# Altium PCB Fatigue_V1.01.PcbDoc
Units mil, origin at the board's own origin, x right, y up, seen from the top; angles counter-clockwise.
Board outline 3525 x 2200 mil, 4 copper layers (Component Side, Ground Plane, Power Plane, Solder Side), stack 33.234 mil thick; 73 components, 45 nets, 270 pads, 274 vias.
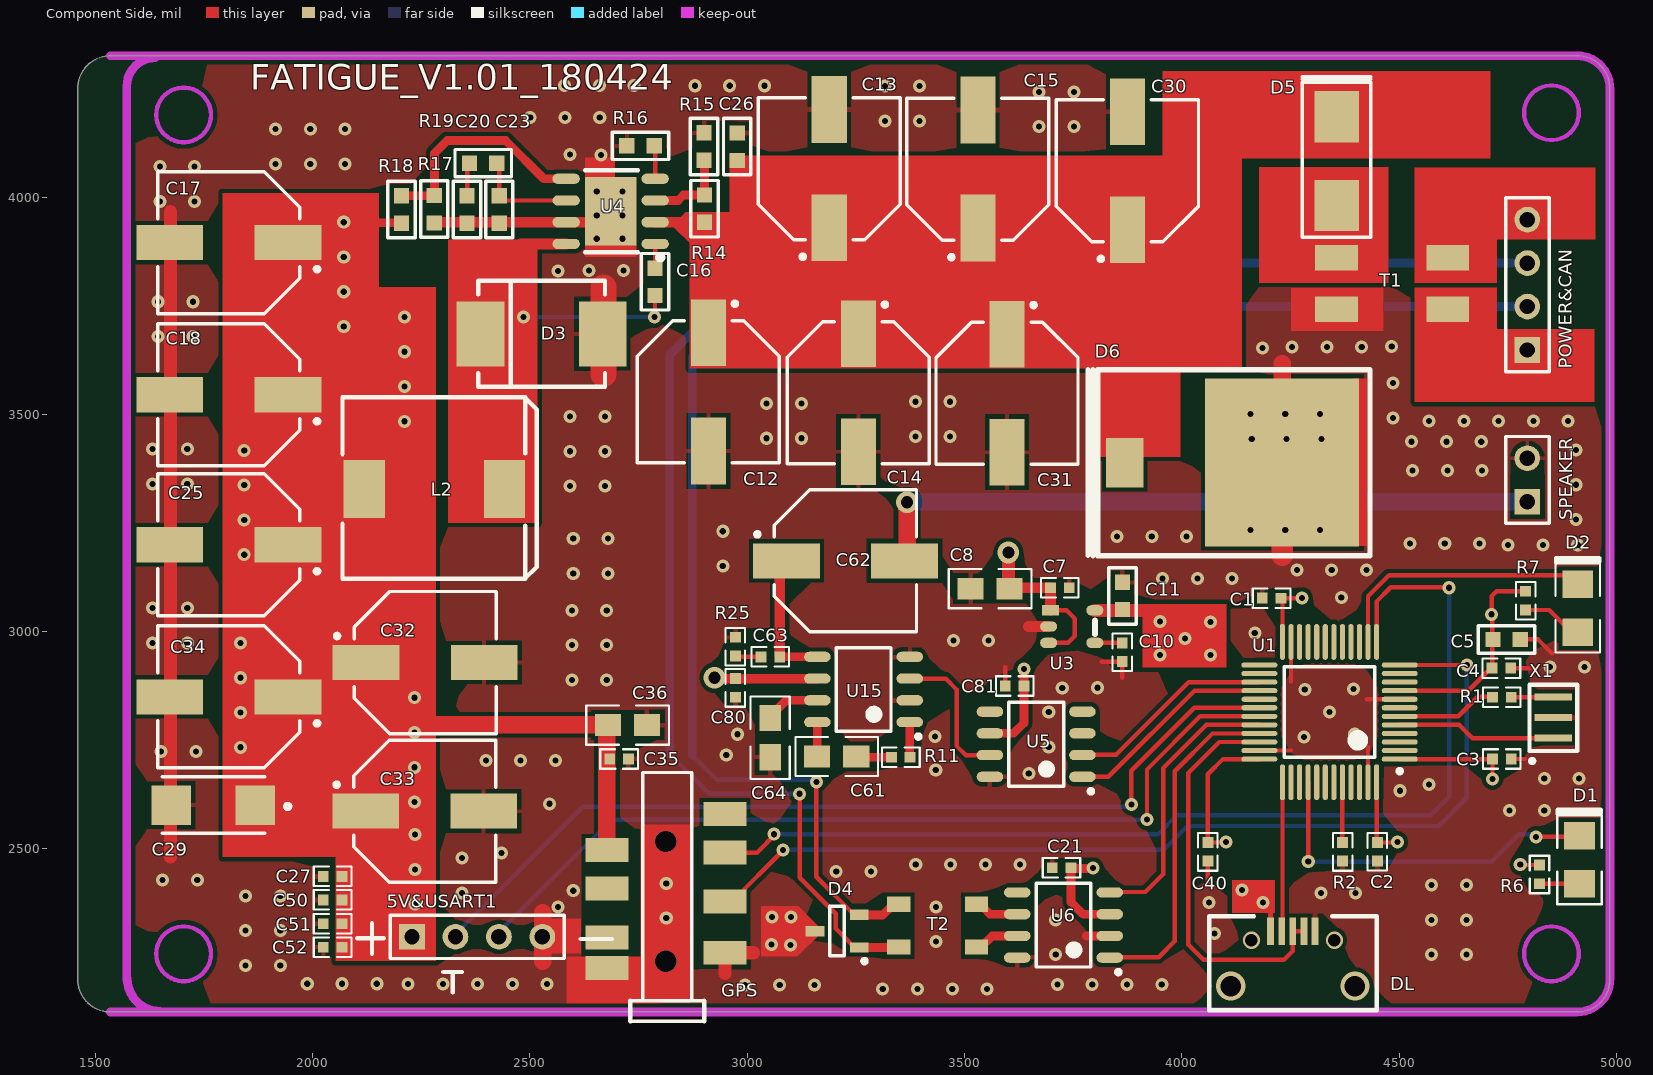
[diagram p0: Component Side view]
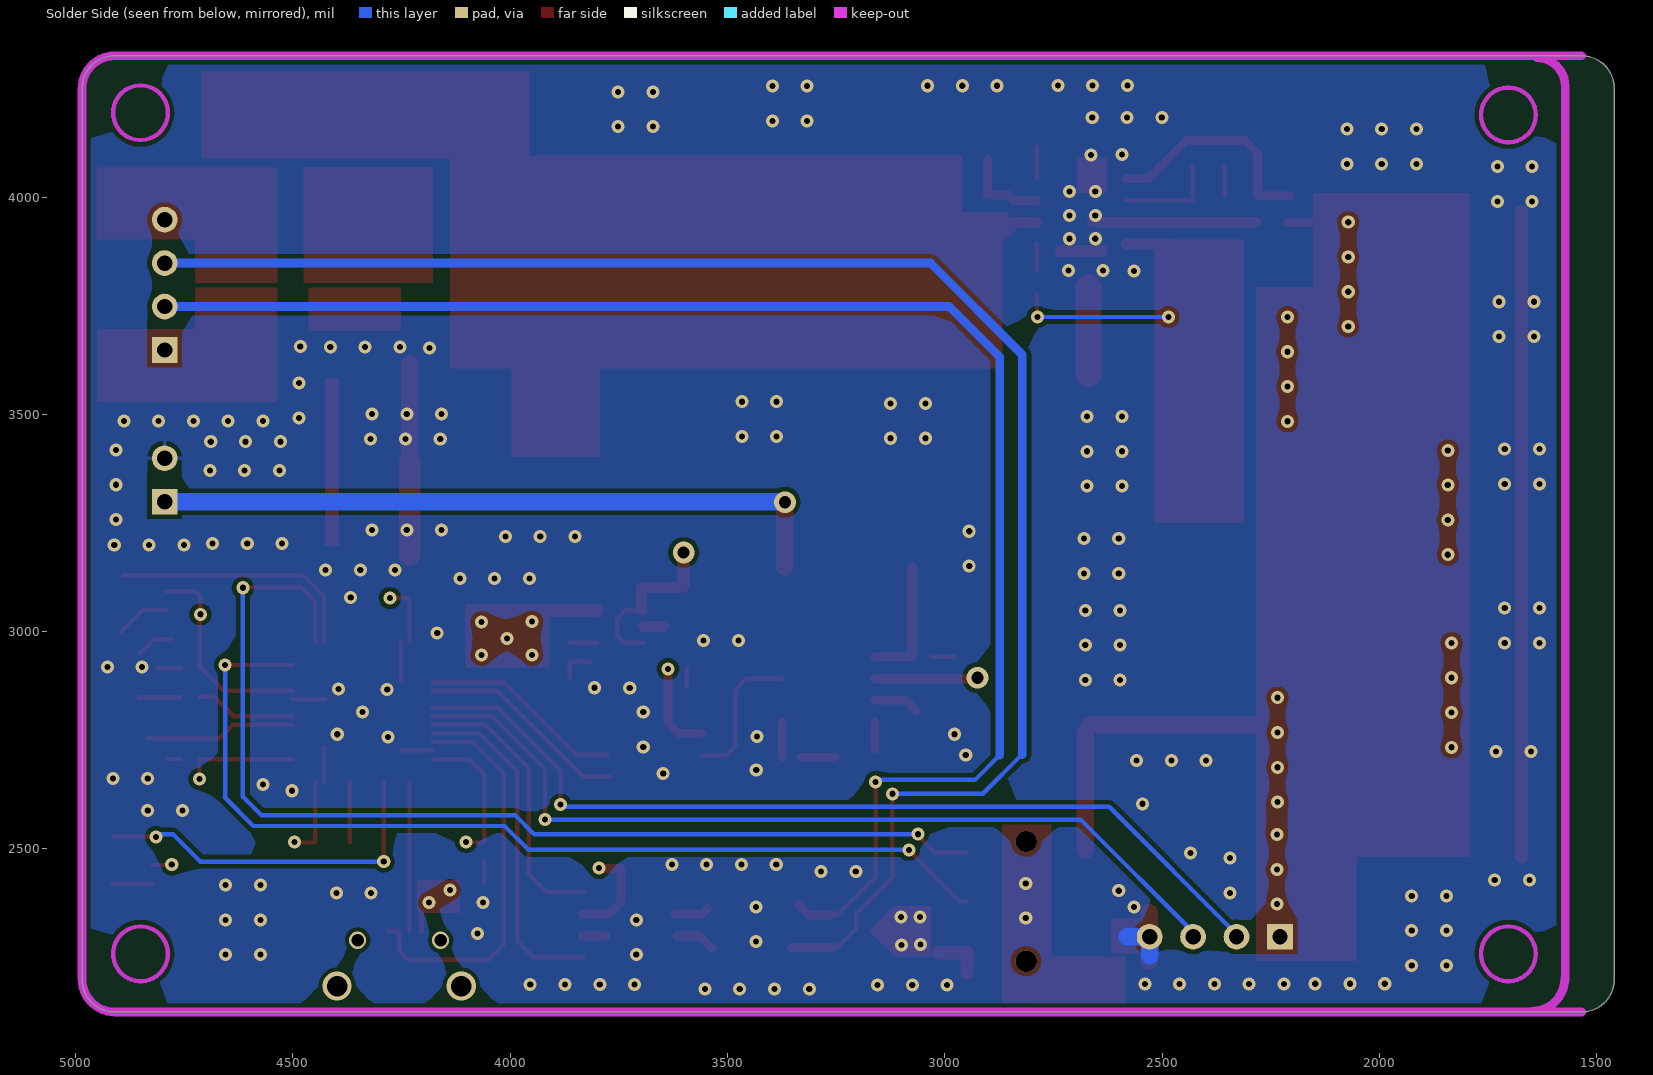
[diagram p1: Solder Side view, seen from below]
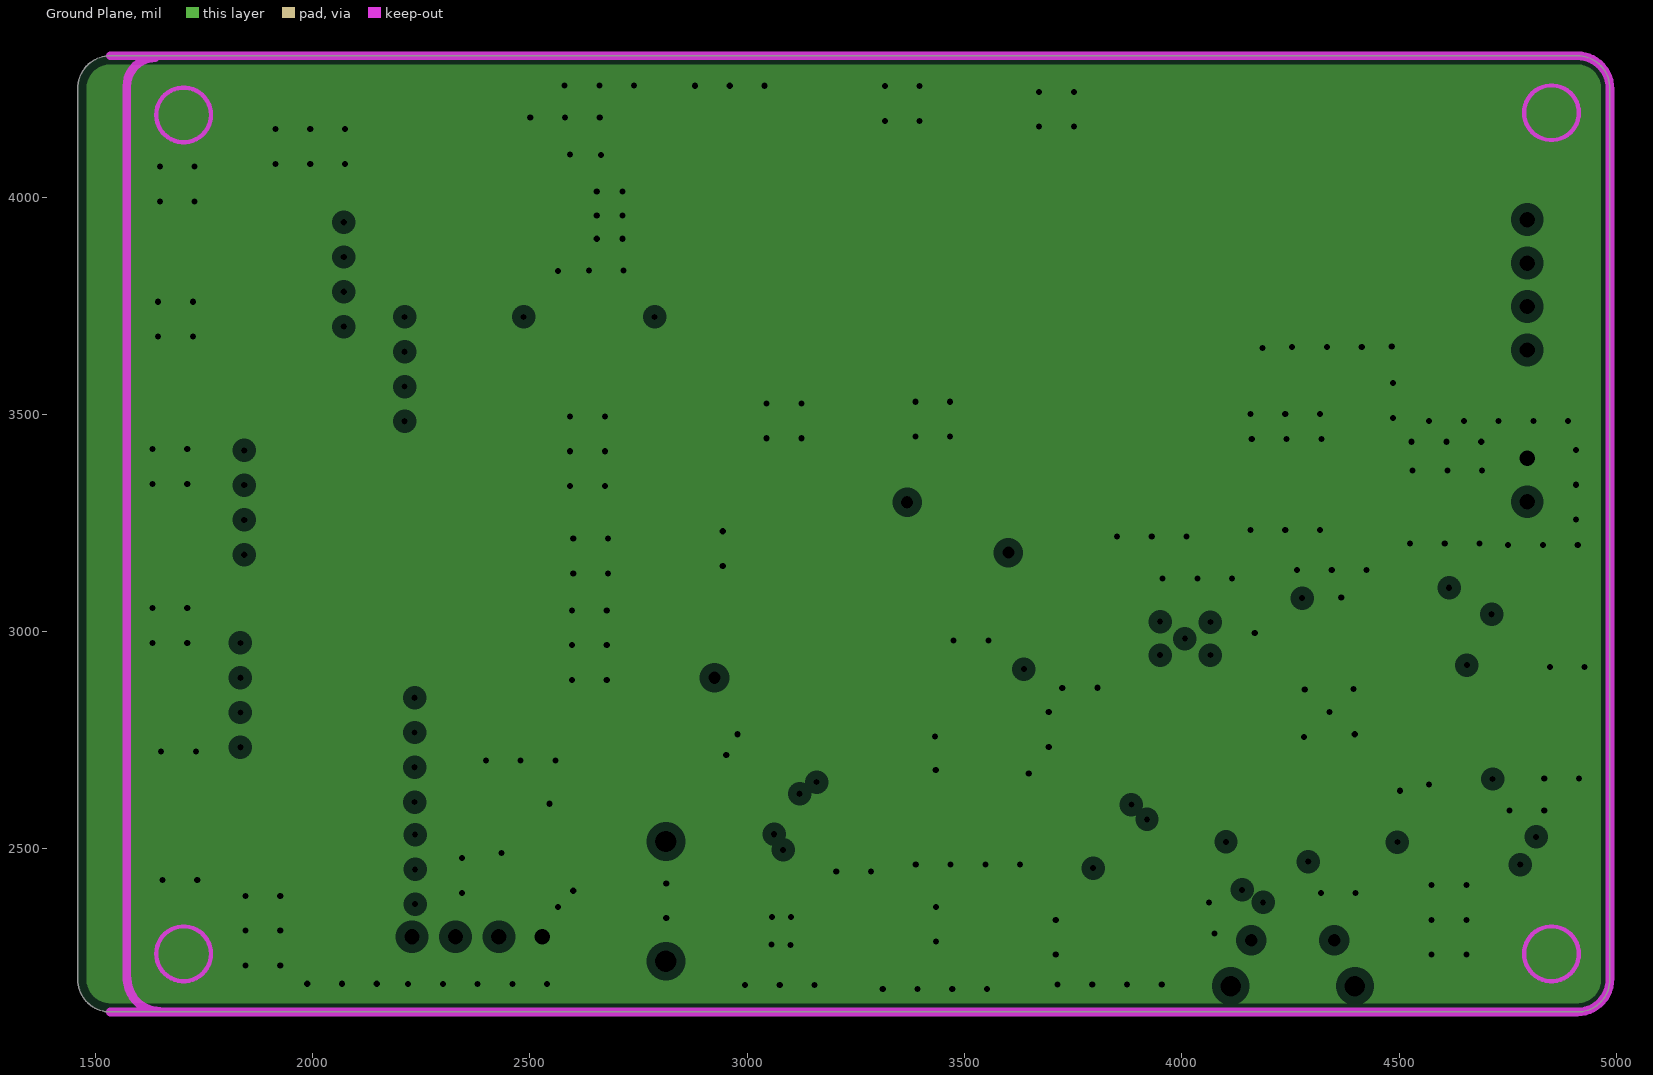
[diagram p2: Ground Plane, clearances drawn from the general rule]
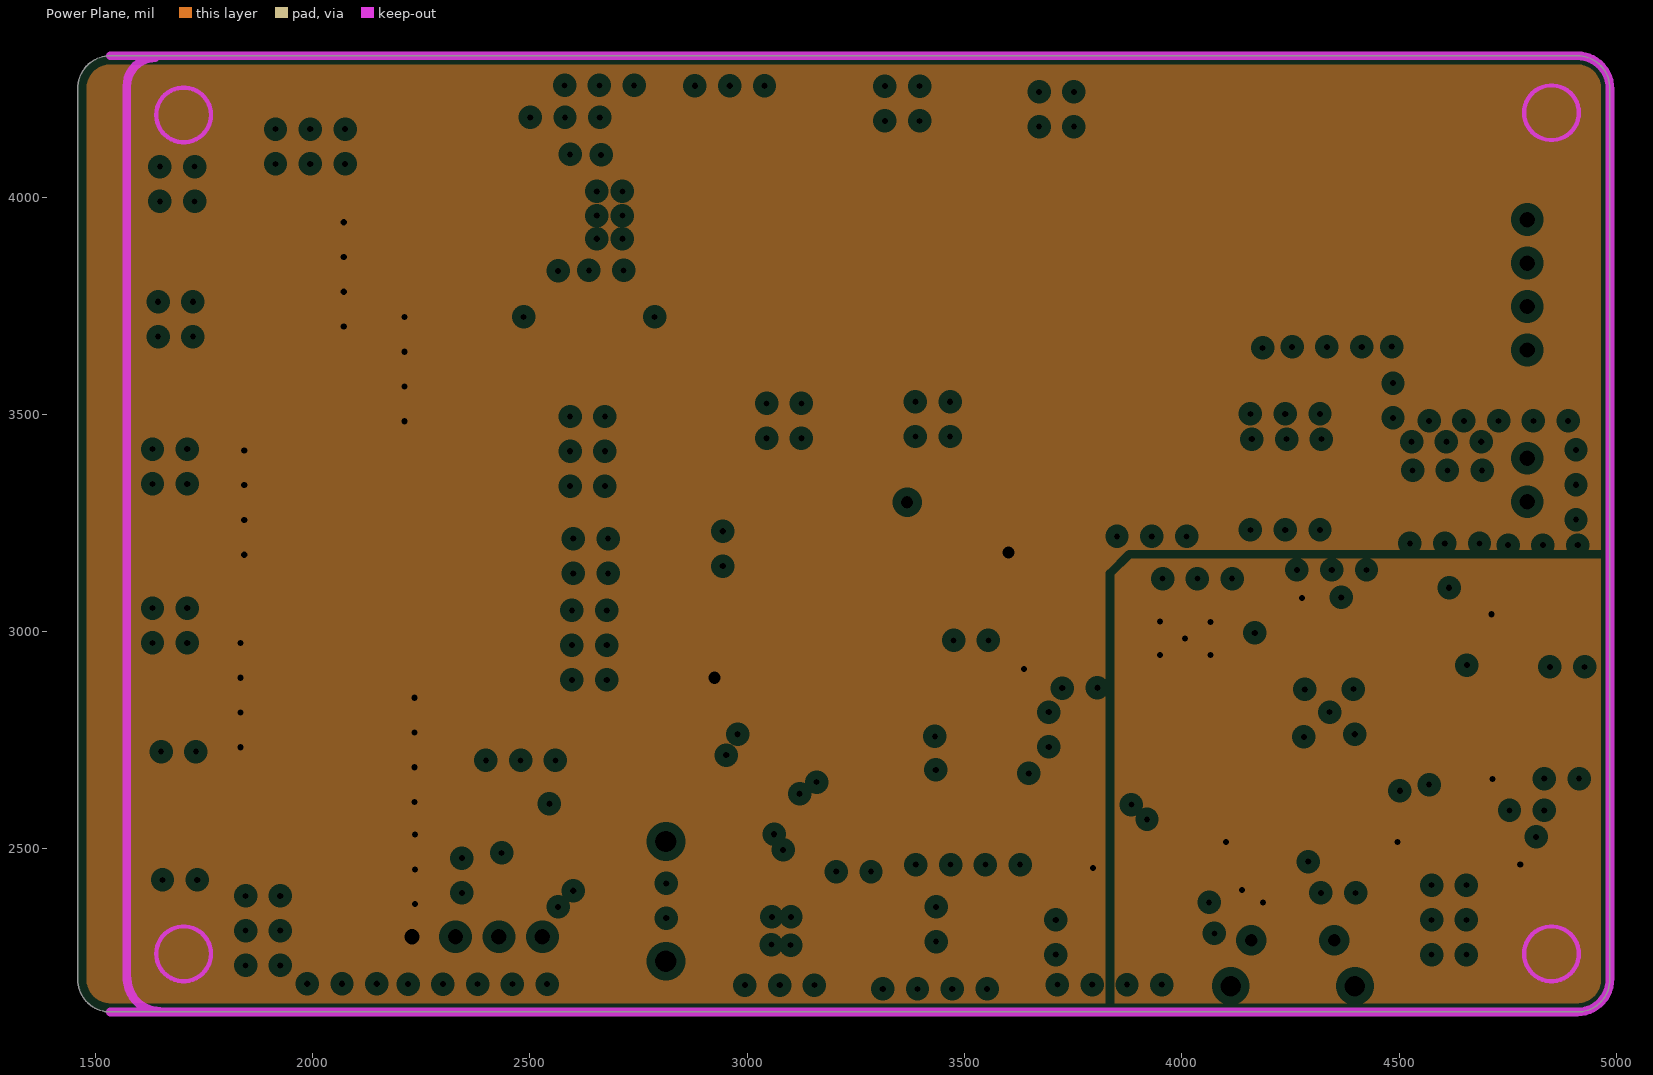
[diagram p3: Power Plane, clearances drawn from the general rule]

## Layer stack, top to bottom
Top Solder: solder mask 0.4, Solder Resist, Dk 3.5
Component Side: signal copper 1.4
Dielectric 1: core 12.6, FR-4, Dk 4.8
Ground Plane: plane copper 1.417, net DGND
Dielectric 3: prepreg 5, Dk 4.2
Power Plane: plane copper 1.417, net (Multiple Nets)
Dielectric 4: core 10, Dk 4.2
Solder Side: signal copper 1.4
Bottom Solder: solder mask 0.4, Solder Resist, Dk 3.5

## Board outline
1535,2125 cw(c1535,2200) 1460,2200 1460,4250 cw(c1535,4250) 1535,4325 4910,4325 cw(c4910,4250) 4985,4250 4985,2200 cw(c4910,2200) 4910,2125

## Design rules (kind name [scope] priority, off if disabled: settings)
Clearance [All] p1: gap=10
ComponentClearance [All] p1: gap=0 collisioncheckmode=3 verticalgap=0 showdistances=FALSE
PlaneClearance [All] p1: clearance=20
PlaneConnect [All] p1: planeconnectstyle=Direct reliefexpansion=20 reliefentries=4 reliefconductorwidth=10 reliefairgap=10
PolygonConnect PolygonConnect_via [IsVia] p1: connectstyle=Direct reliefconductorwidth=10 reliefentries=4 polygonreliefangle="90 Angle" airgapwidth=10
PolygonConnect PolygonConnect_DGND [InNet('DGND')] p2: connectstyle=Relief reliefconductorwidth=10 reliefentries=4 polygonreliefangle="90 Angle" airgapwidth=10
RoutingVias [All] p1: holewidth=28 width=50 viastyle="Through Hole" minholewidth=28 minwidth=50 maxholewidth=28 maxwidth=50
SolderMaskExpansion [All] p1: expansion=4
Width [All] p1: maxlimit=80 minlimit=10 preferedwidth=10
27 further rules are at their usual default settings.

## Components (designator, comment, footprint, x,y, rotation, side; value= is the part's Value field where it differs from the comment)
5V&USART1 "TEST_USART2" HDR1X4 2229,2298 r0 top
C1 "100nF" 0402 4313,3081 r270 top
C2 "100nF" 0402 4446,2600 r0 top
C3 "100nF" 0402 4630,2703 r90 top
C4 "100nF" 0402 4629,2912 r90 top
C5 "1uF" 0603 4686,2978 r90 top
C7 "100nF" 0402 3613,3097 r90 top
C8 "22uF" 0805#1 3517,3124 r180 top
C10 "22nF" 0402 3859,3059 r0 top
C11 "1uF" 0603 3868,3021 r180 top
C12 "220uF" cap_pol_8*10.2 2911,3552 r0 top
C13 "220uF" cap_pol_8*10.2 3189,4065 r180 top
C14 "220uF" cap_pol_8*10.2 3256,3550 r0 top
C15 "220uF" cap_pol_8*10.2 3531,4064 r180 top
C16 "0.1uf" 0603 2784,3866 r0 top
C17 "220uF" cap_pol_8*10.2 1808,3895 r270 top
C18 "220uF" cap_pol_8*10.2 1808,3545 r270 top
C20 "4.7uf" 0603 2360,3910 r180 top
C21 "100nF" 0402 3617,2453 r90 top
C23 "47pf" 0603 2434,3910 r180 top
C25 "220uF" cap_pol_8*10.2 1808,3200 r270 top
C26 "100nF，50V" 0603 2973,4177 r0 top
C27 "100nF,10V" 0402 1940,2433 r90 top
C29 "47uF,16V" 6032_pol 1656,2646 r180 top
C30 "220uF" cap_pol_8*10.2 3875,4060 r180 top
C31 "220uF" cap_pol_8*10.2 3598,3549 r0 top
C32 "220uF" cap_pol_8*10.2 2259,2929 r90 top
C33 "220uF" cap_pol_8*10.2 2258,2587 r90 top
C34 "220uF" cap_pol_8*10.2 1808,2850 r270 top
C35 "100nF" 0402 2599,2703 r90 top
C36 "22uF" 0805#2 2680,2785 r0 top
C40 "100nF" 0402 4064,2387 r180 top
C50 "100nF,10V" 0402 1940,2379 r90 top
C51 "100nF,10V" 0402 1940,2324 r90 top
C52 "100nF,10V" 0402 1940,2270 r90 top
C61 "22uF/25V" 0805#1 3248,2688 r0 top
C62 "220uF/16V 8*6.8" cap_pol_8*10.2 3226,3163 r90 top
C63 "0.05uF" 0402 2947,2938 r90 top
C64 "22uF/25V" 0805#1 3028,2714 r270 top
C80 "100nF" 0402 2969,2977 r0 top
C81 "100nF" 0402 3722,2879 r270 top
D1 "LED0" 1206_LED 4912,2473 r90 top
D2 "LED0" 1206_LED 4908,3052 r90 top
D3 "B560C" SMC 2530,3686 r0 top
D4 "PESD2CAN" SOT23 3206,2313 r180 top
D5 "VS-3EJH02HM3/6A" B290 4356,4185 r270 top
D6 "SM8S33" SM8S 4231,3389 r180 top
DL "USB_5pin" USBmicro_B 4285,2245 r270 top
GPS "PJ-393-7A" "3.5MM EARPHONE SLOT" 2949,2151 r180 top
L2 "7447798720" 1064 2442,3328 r270 top
POWER&CAN "Header 4" HDR1X4 4795,3648 r90 top
R1 "100" 0402 4630,2845 r90 top
R2 "10K" 0402 4374,2387 r180 top
R6 "2.2K" 0402 4827,2335 r180 top
R7 "2.2K" 0402 4795,2965 r180 top
R11 "1.2K" 0402 3460,2715 r270 top
R14 "442K" 0603 2906,3912 r180 top
R15 "90.9K" 0603 2905,4055 r180 top
R16 "243K" 0603 2816,4122 r270 top
R17 "16.9K" 0603 2454,4082 r270 top
R18 "53.6K" 0603 2209,3910 r180 top
R19 "10.2K" 0603 2276,4033 r0 top
R25 "10R" 0402 2977,2859 r180 top
SPEAKER "SPEAKER" HDR1X2 4795,3299 r90 top
T1 "ACM7060-301-2PL-TL01" ACM7060-301-2P-TL01 4614,3859 r180 top
T2 "ACT45B-510-2P" ACT45B-510-2P 3528,2373 r180 top
U1 "STM32F103C8T6" STM-LQFP48_M 4340,2815 r180 top
U3 "RT9193" SOT-23-5 3741,3010 r270 top
U4 "TPS54560" HSOIC_8 2686,3967 r90 top
U5 "WTN6040" SO8 3666,2740 r180 top
U6 "TJA1050T" SO8 3729,2324 r180 top
U15 "LM386" SO8 3269,2866 r180 top
X1 "8M smd" 8M 4855,2755 r90 top

## Footprints (in the part's own frame and the unit in brackets; to place one, negate y for a bottom-side part, rotate by r counter-clockwise, add the part's x,y. Pads: shape width x height; smd on the part's side, far side on the other; paste and mask are expansions set on the pad)
"3.5MM EARPHONE SLOT" [mm]
  rect 2.5x1.4 smd: 1(0,-2.8) 2(0,-5.8) 3(0,-8.65) 4(0,-10.9) 5(6.9,-8.8) 6(6.9,-6.55) 7(6.9,-3.7) 8(6.9,-1.9)
  silkscreen extent 1.21,-13.33 5.53,1.2
8M [mm]
  rect 0.4x2.2 smd: 1(0,0) 2(1.2,0) 3(2.4,0)
  silkscreen extent -1.45,-1.39 3.13,1.4
0402 [mil]
  rect 25x25 smd: 1(3.98,-127.99) 2(3.98,-84.98)
  silkscreen extent -19,-150 26,-63
0603 [mil]
  rect 35x35 smd: 1(4.25,-92.76) 2(4.25,-29.76)
  silkscreen extent -27,-126 36,4
0805#1 [mil]
  rect 60x50 smd: 1(3,25) 2(-87,25)
  silkscreen extent -137,-20 53,70
0805#2 [mil]
  rect 60x50 smd: 1(90,0) 2(0,0)
  silkscreen extent -50,-45 140,45
1064 [mm]
  rect 3.4x2.4 smd: 1(0,0) 2(0,-8.2)
  silkscreen extent -5.36,-9.47 5.23,1.88
1206_LED [mm]
  rect 1.6x1.8 smd: 1(-1.344,-0.081) 2(1.456,-0.081)
  silkscreen extent -2.54,-1.38 2.98,1.22
6032_pol [mm]
  rect 2.3x2.3 smd: 1(-5.396,1.143) 2(-0.496,1.143)
  silkscreen extent -7.43,-0.51 0.05,2.79
ACM7060-301-2P-TL01 [mm]
  rect 2.5x1.5 smd: 1(0.051,-0.028) 2(6.551,-0.028) 3(0.051,2.972) 4(6.551,2.972)
ACT45B-510-2P [mm]
  rect 1.35x0.9 smd: 1(0,0) 2(4.55,0) 3(0,2.5) 4(4.55,2.5)
B290 [mm]
  rect 3x2.6 smd: 1(0,0) 2(5.2,0)
  silkscreen extent -2.34,-2 7.06,2
cap_pol_8*10.2 [mm]
  rect 2.05x3.9 smd: 1(-0.001,3.443) 1(-0.001,3.443) 2(-0.001,-3.457) 2(-0.001,-3.457)
  silkscreen extent -4.15,-4.16 4.15,5.27
HDR1X2 [mm] "Connector; Header; 2 Position"
  rect 1.5x1.5 hole 0.9: 1(0,0)
  round 1.5 hole 0.9: 2(2.54,0)
  silkscreen extent -1.27,-1.27 3.81,1.27
HDR1X4 [mm] "Connector; Header; 4 Position"
  rect 1.5x1.5 hole 0.9: 1(0,0)
  round 1.5 hole 0.9: 2(2.54,0) 3(5.08,0) 4(7.62,0)
  silkscreen extent -1.27,-1.27 8.89,1.27
HSOIC_8 [mm] "0引脚为地"
  rect 4x3 smd: 0(0,0)
  oval 0.6x1.6 smd: 1(-1.905,-2.6) 2(-0.635,-2.6) 3(0.635,-2.6) 4(1.905,-2.6) 5(1.905,2.6) 6(0.635,2.6) 7(-0.635,2.6) 8(-1.905,2.6)
  silkscreen extent -2.85,-3.05 2.4,1.5
SM8S [mm]
  rect 9x9.8 smd: 1(0,0)
  rect 2.2x2.9 smd: 2(9.2,0)
  silkscreen extent -5.14,-5.44 11.35,5.44
SMC [mil]
  rect 110x150 smd: 1(137.72,-0.87) 2(-143.27,-0.87)
  silkscreen extent -148,-123 143,121
SO8 [mm] "39MM"
  oval 1.55x0.6 smd: 1(-2.675,1.88) 2(-2.675,0.61) 3(-2.675,-0.66) 4(-2.675,-1.93) 5(2.725,-1.93) 6(2.725,-0.66) 7(2.725,0.61) 8(2.725,1.88)
  silkscreen extent -3.3,-2.48 1.63,2.85
SOT23 [mm]
  rect 1.1x0.6 smd: 1(-1.325,1.001) 2(-1.325,-0.899) 3(1.275,0.051)
  silkscreen extent -1.75,-1.4 0.4,1.93
SOT-23-5 [mm]
  rect 0.6x1 smd: 1(-0.995,-1.101)
  oval 0.6x1 smd: 2(-0.045,-1.201) 3(0.905,-1.201) 4(0.905,1.499) 5(-0.995,1.499)
  silkscreen extent -0.4,1.5 0.4,1.5, body extent -1.5,-1.3 1.4,1.5, height 1.2
STM-LQFP48_M [mm] "QFP, 48-Leads, Body 7x7mm, Pitch 0.5mm, IPC Low Density"
  oval 2.1x0.3 smd: 1(-4.1,2.75) 2(-4.1,2.25) 3(-4.1,1.75) 4(-4.1,1.25) 5(-4.1,0.75) 6(-4.1,0.25) 7(-4.1,-0.25) 8(-4.1,-0.75) 9(-4.1,-1.25) 10(-4.1,-1.75) 11(-4.1,-2.25) 12(-4.1,-2.75) 25(4.1,-2.75) 26(4.1,-2.25) 27(4.1,-1.75) 28(4.1,-1.25) 29(4.1,-0.75) 30(4.1,-0.25) 31(4.1,0.25) 32(4.1,0.75) 33(4.1,1.25) 34(4.1,1.75) 35(4.1,2.25) 36(4.1,2.75)
  oval 0.3x2.1 smd: 13(-2.75,-4.1) 14(-2.25,-4.1) 15(-1.75,-4.1) 16(-1.25,-4.1) 17(-0.75,-4.1) 18(-0.25,-4.1) 19(0.25,-4.1) 20(0.75,-4.1) 21(1.25,-4.1) 22(1.75,-4.1) 23(2.25,-4.1) 24(2.75,-4.1) 37(2.75,4.1) 38(2.25,4.1) 39(1.75,4.1) 40(1.25,4.1) 41(0.75,4.1) 42(0.25,4.1) 43(-0.25,4.1) 44(-0.75,4.1) 45(-1.25,4.1) 46(-1.75,4.1) 47(-2.25,4.1) 48(-2.75,4.1)
  silkscreen extent -4.23,-2.65 2.65,3.57, body extent -3.5,-3.5 3.5,3.5, height 1.6
USBmicro_B [mm]
  rect 1.6x0.4 smd: 1(-1.663,-2.05) 1(-1.663,-2.05) 2(-1.663,-1.4) 2(-1.663,-1.4) 3(-1.663,-0.75) 3(-1.663,-0.75) 4(-1.663,-0.1) 4(-1.663,-0.1) 5(-1.663,0.55) 5(-1.663,0.55)
  silkscreen extent -2.54,-5.63 2.95,4.16

## Part data
5V&USART1: library part "Header 4", "Header, 4-Pin"
C1 C2 C3 C4 C5 C8 C10 C11 C16 C20 C21 C23 C26 C27 C36 C40 C50 C51 C52 C61 C63 C64 C80 C81: library part Cap, "Capacitor"
C7 C35: library part Cap, "Capacitor,100V"
C12 C13 C14 C15 C17 C18 C25 C29 C30 C31 C32 C33 C34 C62: library part "Cap Pol1", "Polarized Capacitor (Radial)"
D1 D2: "green LED"
D3 D5 D6: library part "Diode 1N4007", "1 Amp General Purpose Rectifier"
D4: library part PESD1CAN
GPS: library part "3.5mm earphone slot"
L2: library part "Inductor Iron", "Magnetic-Core Inductor"
POWER&CAN: "Header, 4-Pin"
R1 R2 R6 R7 R14 R15 R16 R17 R18 R19: library part Res1, "Resistor"
R11: library part "Res Semi", "Semiconductor Resistor"
R25: library part Res2, "Resistor"
SPEAKER: library part "Header 2", "Header, 2-Pin"
T1 T2: library part "Trans Eq", "Transformer (Equivalent Circuit Model)"
U1: "ARM Cortex-M3 32-bit MCU, 64 KB Flash, 20 KB Internal RAM, 37 I/Os, 48-pin LQFP, -40 to 85 degC, Tray"
U6: "CAN Tranceiver"
U15: library part LM386_1

## Via types
v1: diameter 30, hole 14, Component Side to Solder Side, 261 vias
v2: diameter 66.93, hole 47.24, Component Side to Solder Side, 4 vias
v3: diameter 39.37, hole 29.53, Component Side to Solder Side, 4 vias
v4: diameter 50, hole 28, Component Side to Solder Side, 3 vias
v5: diameter 49.21, hole 49.21, Component Side to Solder Side, 2 vias

## Nets (pads, with @x,y where several pads share a name; then routed paths per layer and width w, separated by ;. In a path a pad name is that pad's centre, name@x,y a point inside that pad or via, vN(x,y) a via of type N, cw(c..) or ccw(c..) an arc to the next point about the centre after c; other vN are vias at no path point)
5V: 5V&USART1.1 C7.2 C8.2 C17.1 C18.1 C21.1 C25.1 C27.1 C29.1 C32.1 C33.1 C34.1 C35.2 C36.2 C50.1 C51.1 C52.1 C80.2 C81.2 GPS.5 L2.2 R18.2 U3.1 U3.3 U5.6 U6.3 U15.6 | length 1914.5
  Component Side w10: U3.3 3738.37,2974.37 3754,2990 3754,3030 3734.83,3049.17 U3.1 ; C7.2@3697.65,3100.98 C7.2
  Component Side w20: 2028.76,3940.76 R18.2@2212,3940.76 ; U5.6 3613,2766 3637.02,2790.02 v1@3637.02,2910 ; v1@3788.02,2454.98 3744.99,2454.98 3744.99,2378.01 3773,2350 U6.3
  Component Side w22: v4@2925,2892 U15.6
  Component Side w25: C8.2@3605.98,3100.98 3697.65,3100.98 U3.1
  Component Side w30: C8.2@3601,3105.96 v4(3601,3182)
  Component Side w40: 2263,2786 C36.2@2667,2786 ; GPS.5 C36.2@2677.35,2768
  other v1: 2236,2373 2236,2453 3795.98,2456 2236,2533 2235,2608 2235,2688 1834,2734 2235,2768 1834,2814 2235,2848 1834,2894 3636.98,2914 1834,2974 1843,3177 1843,3257 1843,3337 1843,3417 2212,3484 2212,3564 2212,3644 2072,3702 2212,3724 2072,3782 2072,3862 2072,3942
  other v4: 2925,2894
24V: C12.1 C13.1 C14.1 C15.1 C26.1 C30.1 C31.1 D5.1 D6.2 R14.2 U4.2 | length 156.7
  Component Side w20: C26.1 3020.76,4084.24
  Component Side w25: U4.2 R14.2@2901.51,3942
BELL_BUSY: U1.28 U5.1 | length 489.4
  Component Side w10: U5.1 3831,2666 4029.21,2864.21 U1.28
BELL_DATA: U1.27 U5.2 | length 470.7
  Component Side w10: U5.2@3777,2717 3849,2717 4015.9,2883.9 U1.27
CAN_RX: U1.32 U6.4 | length 653.8
  Component Side w10: U6.4@3827,2401 3916,2401 3957,2442 3957,2686 4056.47,2785.47 U1.32
CAN_TX: U1.33 U6.1 | length 789.9
  Component Side w10: U6.1@3831,2251 3947,2251 3984,2288 3984,2679 4070.79,2765.79 U1.33
CANH: D4.1 POWER&CAN.3 T2.4 | length 3837.8
  Component Side w10: v1(3121,2627) 3121,2434 3204,2351 3204,2317 3247.4,2273.6 D4.1 ; D4.1@3249,2275 3251.4,2275 D4.1@3255,2278.6
  Component Side w20: D4.1@3259.16,2273.57 T2.4@3353,2273.57
  Solder Side w10: 2820,2720 2913,2627 v1(3121,2627)
  Solder Side w20: 2822,2717 2822,3637 3033,3848 POWER&CAN.3
CANL: D4.2 POWER&CAN.2 T2.2 | length 3631.4
  Component Side w10: v1@3159,2652 3159,2436 3247,2348 3249.6,2348 D4.2@3255,2353.4
  Component Side w20: D4.2@3262,2348 3312,2348 T2.2@3336,2372
  Solder Side w10: 2874,2716 2931,2659 3155,2659 v1(3160,2654)
  Solder Side w20: 2874,2716 2874,3632 2990,3748 POWER&CAN.2
D3V3: C1.2 C2.2 C3.2 C4.2 C5.2 C11.2 C40.1 DL.1 R6.1 R7.1 U1.1 U1.9 U1.24 U1.36 U1.48 U3.5 | length 1701.1
  Component Side w10: v1@4102.99,2514.99 C40.1 4060.02,2672.02 4094.73,2706.73 U1.36 ; U1.24 C1.2@4231.73,3076 ; C1.2@4232.73,3077 v1(4277,3077) ; C2.2@4448.27,2516.73 U1.48 ; C2.2 v1@4491.98,2515.02 ; U1.1 C3.2@4711,2706.73 ; U1.9 4659.21,2864.21 C4.2@4711,2916 ; v1(4713,3040) 4713,3082 4723.99,3092.99 R7.1 ; C4.2 v1@4713.98,3031.02 ; v1@4714.98,2655.98 C3.2 ; v1@4780.01,2462.99 R6.1
  Component Side w12: DL.1@4204.29,2310.47 4204.29,2380.71
  Component Side w30: U3.5 4001,3049.17
  other v1: 4187,2377 4139,2406 4778.76,2464.24 4101.74,2516.24 4496,2516 4714.98,2661 3950,2946 4066,2946 4007,2984 4066,3022 3950,3023
DGND: 5V&USART1.4 C1.1 C2.1 C3.1 C4.1 C5.1 C7.1 C8.1 C10.1 C11.1 C12.2 C13.2 C14.2 C15.2 C17.2 C18.2 C20.2 C21.2 C23.2 C25.2 C26.2 C27.2 C29.2 C30.2 C31.2 C32.2 C33.2 C34.2 C35.1 C36.1 C40.2 C50.2 C51.2 C52.2 C64.1 C80.1 C81.1 D3.1 D4.3 D6.1 DL.5 GPS.1 GPS.8 R2.2 R15.1 R16.1 R19.1 R25.1 SPEAKER.2 T1.4 U1.8 U1.23 U1.35 U1.47 U3.2 U4.0 U4.7 U5.8 U6.2 U6.8 U15.2 U15.4 X1.2 | length 3646.4
  Component Side w10: C81.1 3594.01,2917.99 ; 3815.99,2931.01 C10.1 3862.98,2894.02 ; 4060.02,2421 C40.2 ; U1.35 4251.42,2726.42 ; 4251.42,2885.42 U1.23 ; 4425.47,2844.53 U1.8 ; U1.47 4428.58,2734.42 ; C4.1 4810.98,2915.98 ; C3.1 4789.02,2706.98 ; C5.1 4819.75,2982.25 4852,2950
  Component Side w20: 3781,2300 U6.2
  Component Side w25: R19.1@2285,3942 U4.0@2661,3942 ; 3647.23,3011.77 U3.2
  Component Side w30: 1673,2482 1673,3967 ; 5V&USART1.4@2531,2300 2587,2300 ; 2949,2214 GPS.1 3014.24,2261.24
  Component Side w40: 2530,2242 2530,2353 ; D6.1 4231,3617
  Component Side w50: 4231,3176 D6.1
  Component Side w60: 2670,3593 2670,3792
  Solder Side w40: 2529,2254 5V&USART1.4 2581,2298
  other v1: 3312,2178 3392,2178 3472,2178 3552,2178 2995,2187 3075,2187 3155,2187 3714,2188 3794,2188 3874,2188 3954,2188 2220,2189 2300,2189 2380,2189 2460,2189 2540,2189 1988,2190 2068,2190 2148,2190 1846,2232 1926,2232 3710,2257 4575,2257 4655,2257 3099.98,2279 3055.98,2280 3435,2287 4075,2306 1846,2312 1926,2312 3710,2337 4575,2337 4655,2337 2814,2341 3056.98,2344 3100.98,2344 2565,2367 3435,2367 4063,2377 1846,2392 1926,2392 2344,2399 4320,2399 4400,2399 2600,2404 4575,2417 4655,2417 2814,2421 1655,2429 1735,2429 3205,2448 3285,2448 3388,2464 3468,2464 3548,2464 3628,2464 2344,2479 2435,2491 4754,2589 4834,2589 2545,2604 4502,2634 4569,2648 4834,2662 4914,2662 3648,2674 3434,2682 2399,2704 2479,2704 2559,2704 2952,2716 1652,2724 1732,2724 3694,2735 4281,2758 3432,2759 2978,2764 4398,2764 3694,2815 4340,2815 4283,2867 4395,2868 3725,2870 3806,2871 2597,2889 2677,2889 4847,2919 4927,2919 2597,2969 2677,2969 1632,2974 1712,2974 3475,2980 3555,2980 4168,2997 2597,3049 2677,3049 1632,3054 1712,3054 4367,3079 3956,3122 4036,3122 4116,3122 2600,3134 2680,3134 4265,3142 4345,3142 4425,3142 2944,3151 4751,3199 4831,3199 4911,3199 4525,3203 4605,3203 4685,3203 2600,3214 2680,3214 3851,3219 3931,3219 4011,3219 2944,3231 4158,3234 4238,3234 4318,3234 4907,3258 2593,3335 2673,3335 4907,3338 1632,3340 1712,3340 4531,3371 4611,3371 4691,3371 2593,3415 2673,3415 4907,3418 1632,3420 1712,3420 4529,3437 4609,3437 4689,3437 4161,3443 4241,3443 4321,3443 3045,3445 3125,3445 3387,3449 3467,3449 4569,3485 4649,3485 4729,3485 4809,3485 4889,3485 4486,3492 2593,3495 2673,3495 4158,3501 4238,3501 4318,3501 3045,3525 3125,3525 3387,3529 3467,3529 4486,3572 4186,3653 4254,3655 4334,3655 4414,3655 4483,3656 1645,3679 1725,3679 1645,3759 1725,3759 2565,3830 2636,3831 2716,3831 2654,3904 2713,3904 2654,3957 2713,3957 1649,3990 1729,3990 2654,4013 2713,4013 1649,4070 1729,4070 1915,4076 1995,4076 2075,4076 2664,4097 2593,4098 1915,4156 1995,4156 2075,4156 3672,4162 3752,4162 3317,4175 3397,4175 2501,4183 2581,4183 2661,4183 3672,4242 3752,4242 3317,4255 3397,4255 2880,4256 2960,4256 3040,4256 2580,4257 2660,4257 2740,4257
LED0: D1.2 U1.40 | length 829.5
  Component Side w10: v1@4290.79,2471 U1.40 ; v1(4815,2528) D1.2@4912.86,2528
  Solder Side w10: v1(4291,2471) 4713,2471 4776,2534 v1@4814,2534
LED1: D2.2 U1.14 | length 586.6
  Component Side w10: U1.14 4428.58,3081.58 4477,3130 D2.2@4890,3130
NetC10_2: C10.2 U3.4 | length 62.6
  Component Side w10: U3.4 C10.2@3862.63,2974.37
NetC16_1: C16.1 D3.2 L2.1 U4.8 | length 457.4
  Component Side w10: v1@2788.25,3722.75 C16.1 C16.1@2788.25,3774.24
  Component Side w25: 2479,3892 U4.8
  Solder Side w10: v1@2485.75,3724 v1(2787,3724)
  other v1: 2485.75,3724.25
NetC16_2: C16.2 U4.1 | length 59
  Component Side w10: C16.2@2788.36,3833 U4.1
NetC20_1: C20.1 R17.1 | length 69.5
  Component Side w10: C20.1 R17.1@2355.75,4072.25
NetC23_1: C23.1 R17.2 U4.6 | length 223.1
  Component Side w10: C23.1 R17.2@2429.75,4072.24 ; C23.1@2430,3992 U4.6
NetC61_1: C61.1 R11.1 | length 79
  Component Side w20: C61.1@3252.98,2711.02 R11.1
NetC61_2: C61.2 U15.8 | length 62
  Component Side w20: C61.2@3161.7,2730 U15.8
NetC62_1: C62.1 C63.1 U15.5 | length 288.2
  Component Side w20: C63.1 U15.5
  Component Side w25: C63.1@3074.99,2945 C62.1@3074.99,3146.49
NetC62_2: C62.2 SPEAKER.1 | length 1568.9
  Component Side w40: C62.2@3368.11,3149 v4(3368.11,3297.89)
  Solder Side w40: v4@3375,3299 SPEAKER.1
NetC63_2: C63.2 R25.2 | length 55
  Component Side w10: R25.2@2977.02,2941.98 C63.2
NetC64_2: C64.2 U15.7 | length 107.1
  Component Side w20: C64.2@3065,2817 3090,2842 U15.7
NetD1_1: D1.1 R6.2 | length 92.1
  Component Side w10: R6.2 D1.1@4915.07,2419.98
NetD2_1: D2.1 R7.2 | length 126.2
  Component Side w10: R7.2 4845.28,3049.98 D2.1@4896.17,2999.08
NetD5_1: D5.2 T1.2
NetR1_1: R1.1 X1.3 | length 96.5
  Component Side w10: R1.1@4758.5,2849.49 X1.3
NetR1_2: R1.2 U1.6 | length 232.2
  Component Side w10: U1.6 4636.16,2805.16 4681,2850 R1.2@4715,2850
NetR2_1: R2.1 U1.44 | length 137.8
  Component Side w10: R2.1@4369.53,2515.75 U1.44
NetR11_2: R11.2 U15.1 | length 80.3
  Component Side w20: R11.2@3374.3,2711.74 U15.1
NetR14_1: R14.1 R15.2 U4.3 | length 199.9
  Component Side w20: U4.3 2841,3992 2853.76,4004.76 R14.1 R15.2@2901.75,4086
NetR16_2: R16.2 U4.4 | length 73.6
  Component Side w10: U4.4 R16.2@2788.36,4115.62
NetR18_1: R18.1 R19.2 U4.5 | length 518.1
  Component Side w20: R18.1@2205.23,4003.24 R19.2 ; R19.2@2281,4009 2281,4101 2310,4130 2444,4130 2532,4042 U4.5
NetT2_1: T2.1 U6.6 | length 81.1
  Component Side w20: T2.1@3546,2363 3559,2350 U6.6
NetT2_3: T2.3 U6.7 | length 92.6
  Component Side w20: T2.3@3536,2272 3564,2300 U6.7@3617,2300
NetU1_5: U1.5 X1.1 | length 346.2
  Component Side w10: U1.5 4638.53,2785.47 4669,2755 X1.1@4835,2755
NetU5_7: U5.7 U15.3 | length 333.5
  Component Side w10: U15.3 3457,2892 3482,2867 3482,2737 3503,2716 U5.7
POWER+: POWER&CAN.4 T1.1
POWER-: POWER&CAN.1 T1.3
SWCLK: DL.2 U1.37 | length 343.1
  Component Side w10: DL.2@4231.73,2310.47 U1.37
SWDIO: DL.3 DL.4 U1.34 | length 922.1
  Component Side w10: U1.34 4086.1,2746.1 4015,2675 4015,2280 4050,2245 4235,2245 4255.47,2265.47 4255.47,2310.47 DL.4@4281.06,2310.47
USART1_RX: 5V&USART1.3 U1.31 | length 2026.7
  Component Side w10: v1(3920,2568) 3920,2683 4042.16,2805.16 U1.31
  Solder Side w10: 5V&USART1.3@2425,2305 2687,2567 v1@3919,2567
USART1_TX: 5V&USART1.2 U1.30 | length 2114
  Component Side w10: v1(3884,2602) 3884,2680 4028.84,2824.84 U1.30
  Solder Side w10: 5V&USART1.2@2326,2301 2622,2597 3882,2597 v1@3884,2599
USART2_RX: GPS.3 U1.13 | length 2479.2
  Component Side w10: GPS.3 3022.55,2491.55 v1@3067,2536 ; U1.13 4448.27,3069.27 4481,3102 v1@4614,3102
  Solder Side w10: v1(3062,2534) 3945,2534 3989,2578 4573,2578 4615,2620 v1@4615,3102
  other v1: 4615,3101
USART2_TX: GPS.2 U1.12 | length 2264.1
  Component Side w10: GPS.2 2965.35,2379.35 3083,2497 v1(3083,2498) ; U1.12 v1@4653.27,2923.27
  Solder Side w10: v1(3083,2498) 3958,2498 4013,2553 4591,2553 4657,2619 4656,2620 v1(4656,2923)
pads on no net: GPS.4 GPS.6 GPS.7 U1.2 U1.3 U1.4 U1.7 U1.10 U1.11 U1.15 U1.16 U1.17 U1.18 U1.19 U1.20 U1.21 U1.22 U1.25 U1.26 U1.29 U1.38 U1.39 U1.41 U1.42 U1.43 U1.45 U1.46 U5.3 U5.4 U5.5 U6.5
copper on no net:
  other v2: 4112.76,2184.49 4112.76,2184.49 4398.19,2184.49 4398.19,2184.49
  other v3: 4160,2290 4160,2290 4350.94,2290 4350.94,2290
  other v5: 2813.17,2241.55 2813.17,2517.14

## Polygon pours and split planes (outlines as drawn)
DGND on Component Side "Top GND" (solid, remove dead copper, pour order 0): 1565,4325 1565,2125 4984,2125 4985,2126 4985,4325
DGND on Solder Side "Bot GND" (solid, remove dead copper, pour order 2): 1565,4325 1565,2125 4984,2125 4985,2126 4985,4325
DGND on Ground Plane (split plane): 4916.16,4304.64 4922.24,4303.61 4928.16,4301.9 4933.86,4299.54 4939.25,4296.56 4944.28,4292.99 4948.88,4288.88 4952.99,4284.28 4956.56,4279.25 4959.54,4273.86 4961.9,4268.16 4963.61,4262.24 4964.64,4256.16 4964.96,4250.54 4964.9,4250 4964.9,2200 4964.96,2199.46 4964.64,2193.84 4963.61,2187.76 4961.9,2181.84 4959.54,2176.14 4956.56,2170.75 4952.99,2165.72 4948.88,2161.12 4944.28,2157.01 4939.25,2153.44 4933.86,2150.46 4928.16,2148.1 4922.24,2146.39 4916.16,2145.36 4910.54,2145.04 4910,2145.1 1535,2145.1 1534.46,2145.04 1528.84,2145.36 1522.76,2146.39 1516.84,2148.1 1511.14,2150.46 1505.75,2153.44 1500.72,2157.01 1496.12,2161.12 1492.01,2165.72 1488.44,2170.75 1485.46,2176.14 1483.1,2181.84 1481.39,2187.76 1480.36,2193.84 1480.04,2199.46 1480.1,2200 1480.1,4250 1480.04,4250.54 1480.36,4256.16 1481.39,4262.24 1483.1,4268.16 1485.46,4273.86 1488.44,4279.25 1492.01,4284.28 1496.12,4288.88 1500.72,4292.99 1505.75,4296.56 1511.14,4299.54 1516.84,4301.9 1522.76,4303.61 1528.84,4304.64 1534.46,4304.96 1535,4304.9 4910,4304.9 4910.54,4304.96
D3V3 on Power Plane (split plane): 4964.9,2200 4964.96,2199.46 4964.64,2193.84 4963.61,2187.76 4961.9,2181.84 4959.54,2176.14 4956.56,2170.75 4952.99,2165.72 4948.88,2161.12 4944.28,2157.01 4939.25,2153.44 4933.86,2150.46 4928.16,2148.1 4922.24,2146.39 4916.16,2145.36 4910.54,2145.04 4910,2145.1 3845.09,2145.1 3845.09,3129.82 3883.18,3167.91 4964.9,3167.91
5V on Power Plane (split plane): 4916.16,4304.64 4922.24,4303.61 4928.16,4301.9 4933.86,4299.54 4939.25,4296.56 4944.28,4292.99 4948.88,4288.88 4952.99,4284.28 4956.56,4279.25 4959.54,4273.86 4961.9,4268.16 4963.61,4262.24 4964.64,4256.16 4964.96,4250.54 4964.9,4250 4964.9,3188.09 3879,3188.09 3876.39,3187.74 3873.96,3186.74 3871.87,3185.13 3827.87,3141.13 3826.26,3139.04 3825.26,3136.61 3824.91,3134 3824.91,2145.1 1535,2145.1 1534.46,2145.04 1528.84,2145.36 1522.76,2146.39 1516.84,2148.1 1511.14,2150.46 1505.75,2153.44 1500.72,2157.01 1496.12,2161.12 1492.01,2165.72 1488.44,2170.75 1485.46,2176.14 1483.1,2181.84 1481.39,2187.76 1480.36,2193.84 1480.04,2199.46 1480.1,2200 1480.1,4250 1480.04,4250.54 1480.36,4256.16 1481.39,4262.24 1483.1,4268.16 1485.46,4273.86 1488.44,4279.25 1492.01,4284.28 1496.12,4288.88 1500.72,4292.99 1505.75,4296.56 1511.14,4299.54 1516.84,4301.9 1522.76,4303.61 1528.84,4304.64 1534.46,4304.96 1535,4304.9 4910,4304.9 4910.54,4304.96

## Keep-outs
Keep-Out Layer:
  circle w10: c4850.56,4193.85 r62.99
  circle w10: c1703.56,4188.85 r62.99
  circle w10: c4850.56,2258.85 r62.99
  circle w10: c1703.56,2258.85 r62.99
  lines w20: 1535,2125 4910,2125 ccw(c4910,2200) 4985,2200 4985,4250 ccw(c4910,4250) 4910,4325 1535,4325 ; 1573,2198 1573,4255.36 cw(c1638,4255.36) 1638,4320.36 ; 1574,2202 ccw(c1649,2202) 1649,2127 ; 1638,4325 1643,4325

## Other copper
Component Side:
  rectangle net DGND: 2540,2260 2618.13,2340
  rectangle net DGND: 2755,2147 2869,2556
  rectangle net DGND: 2585,2145 2804,2253
  rectangle net 24V: 2868,3605 3049,3965
  rectangle net 24V: 2959,3605 4138,4095
  rectangle net 5V: 2053,2242 2284,3793
  rectangle net 5V: 1793,2481 2153,4009
  rectangle net DGND: 3035,2293 3154,2324
  rectangle net POWER+: 4536,3902 4952,4068
  rectangle net POWER+: 4536,3802 4725,3905
  rectangle net NetD5_1: 4178,3802 4476,4069
  rectangle net 24V: 3956,4089 4710,4290
  rectangle net 24V: 3793,3402 3997,3673
  rectangle net POWER-: 4536,3596 4725,3792
  rectangle net POWER-: 4536,3528 4950,3696
  rectangle net NetC16_1: 2312,3250 2518,3902
  rectangle net D3V3: 3910,2917 4103,3064
  rectangle net D3V3: 4115,2353 4214,2429
  rectangle net DGND: 4251.14,3692 4464,3791.8
  rectangle net DGND: 2627,4009 2696,4091
  rectangle net DGND: 2627,3862 2745,3890
  rectangle net DGND: 4394,3197 4426,3582
  region net DGND: 3175,2311 3118,2368 3033,2368 3033,2253 3115.82,2253 3171.82,2309
  region net 24V: 2877,3885 2828,3934 2859,3965 2878,3965
Power Plane (plane layer: these items are gaps in the copper):
  lines w20: 3835,2115.08 3835,3134 3879,3178 4995.02,3178

## Silkscreen, mask and mechanical layers (free items; w line width, h text height)
Top Overlay:
  lines w10: 2103,2295 2164,2295 ; 2137,2259 2137,2329 ; 2301,2217 2344,2217 ; 2323,2170 2323,2212 ; 2617,2293 2689,2293
  text "FATIGUE_V1.01_180424" at 1857,4227 h100

## Dimensions
5085,2125 to 5155,4330 on Top Overlay
1576,2040 to 4974,2067 on Top Overlay

## Text inside footprints (layer, text, board x,y; h text height)
U5: Mechanical 15 "1" at 3647.29,2747.47 h30 r270
U6: Mechanical 15 "1" at 3710.29,2331.47 h30 r270
U15: Mechanical 15 "1" at 3250.29,2873.47 h30 r270